# Altium PCB BleDemoBoard.PcbDoc
Units mil, origin at the board's own origin, x right, y up, seen from the top; angles counter-clockwise.
Board outline 3545 x 3150 mil, 2 copper layers (Top Layer, Bottom Layer); 24 components, 22 nets, 90 pads, 3 vias.
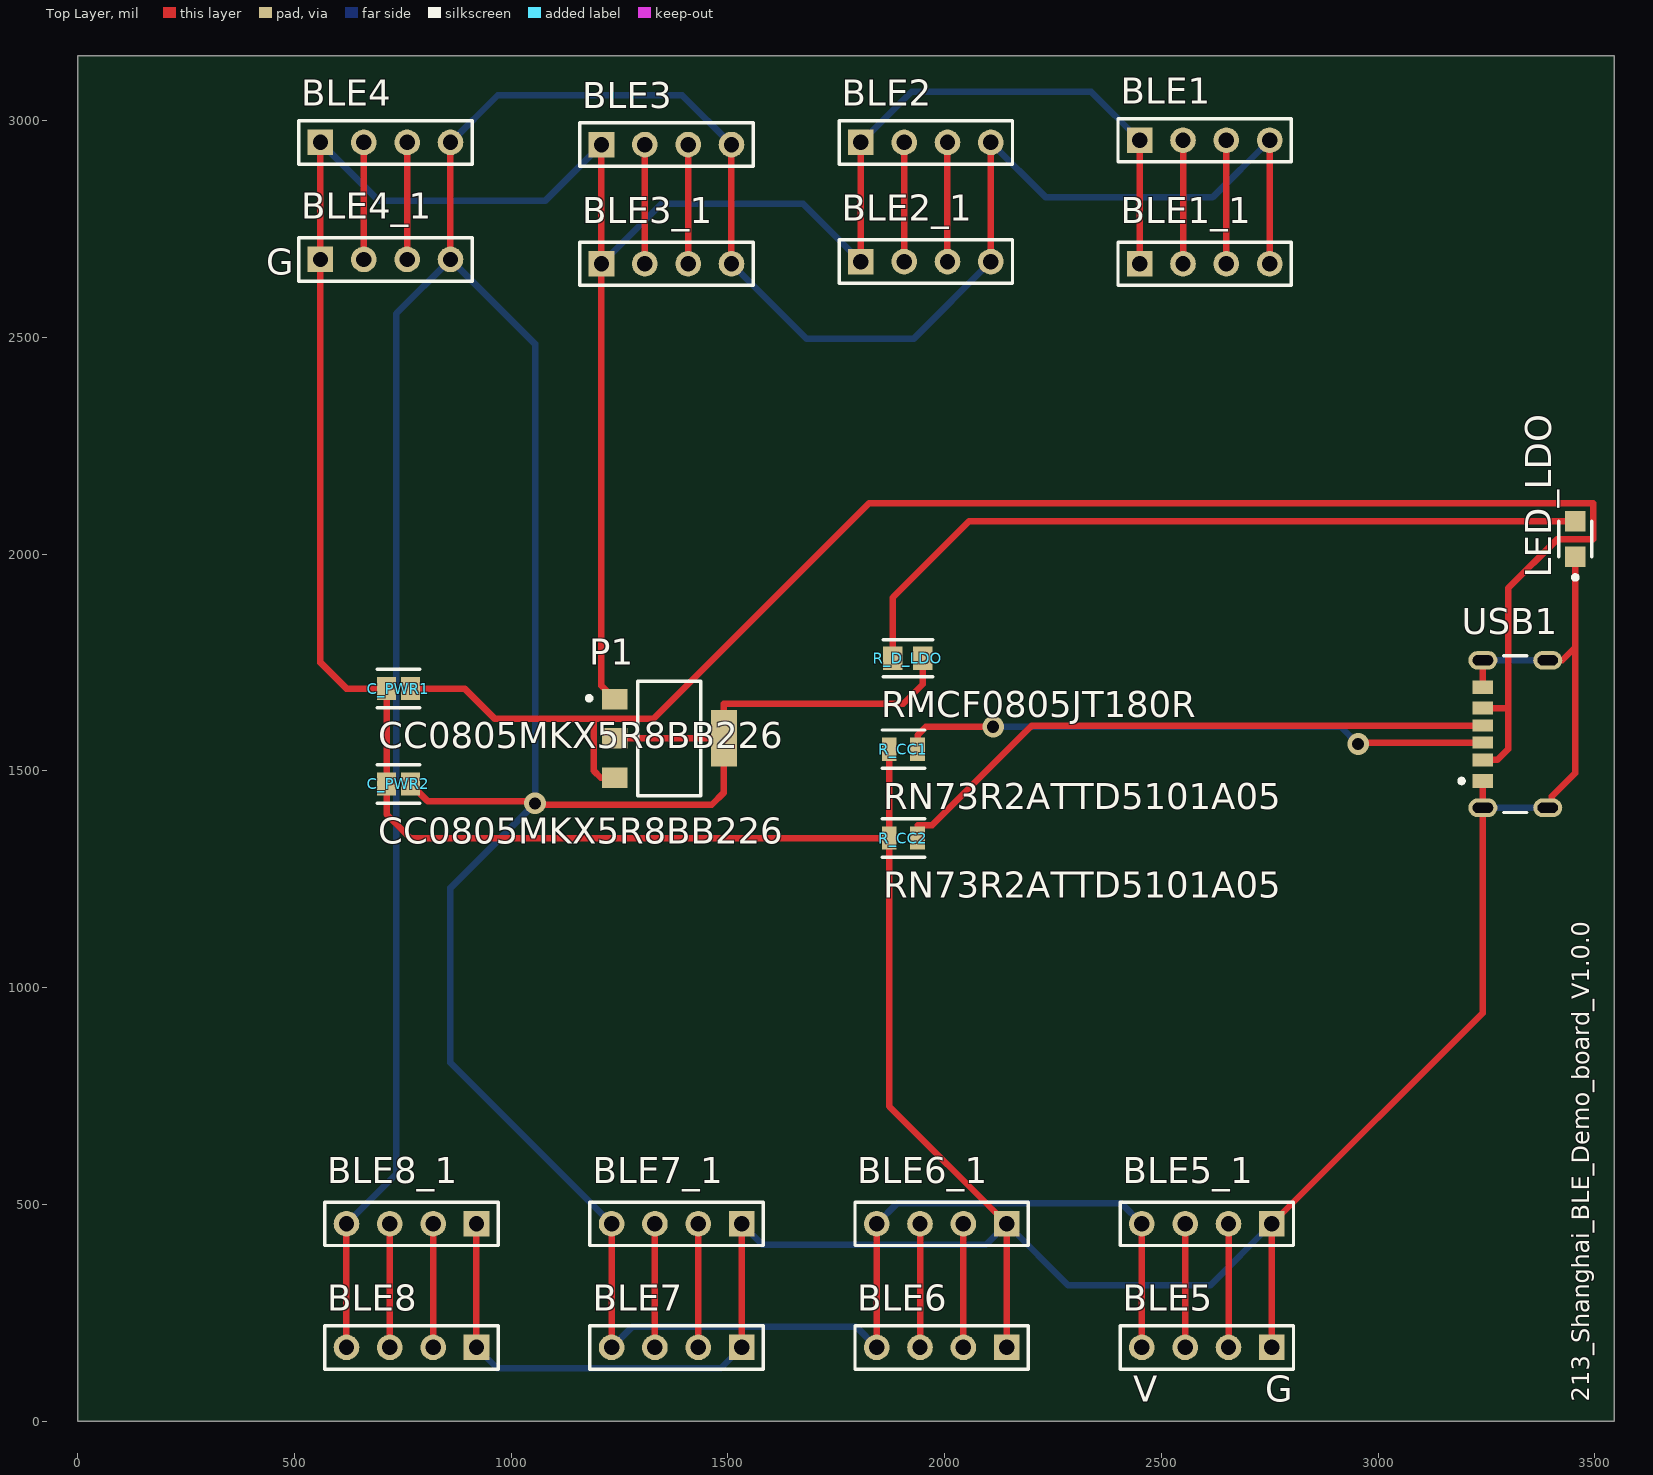
[diagram p0: Top Layer view]
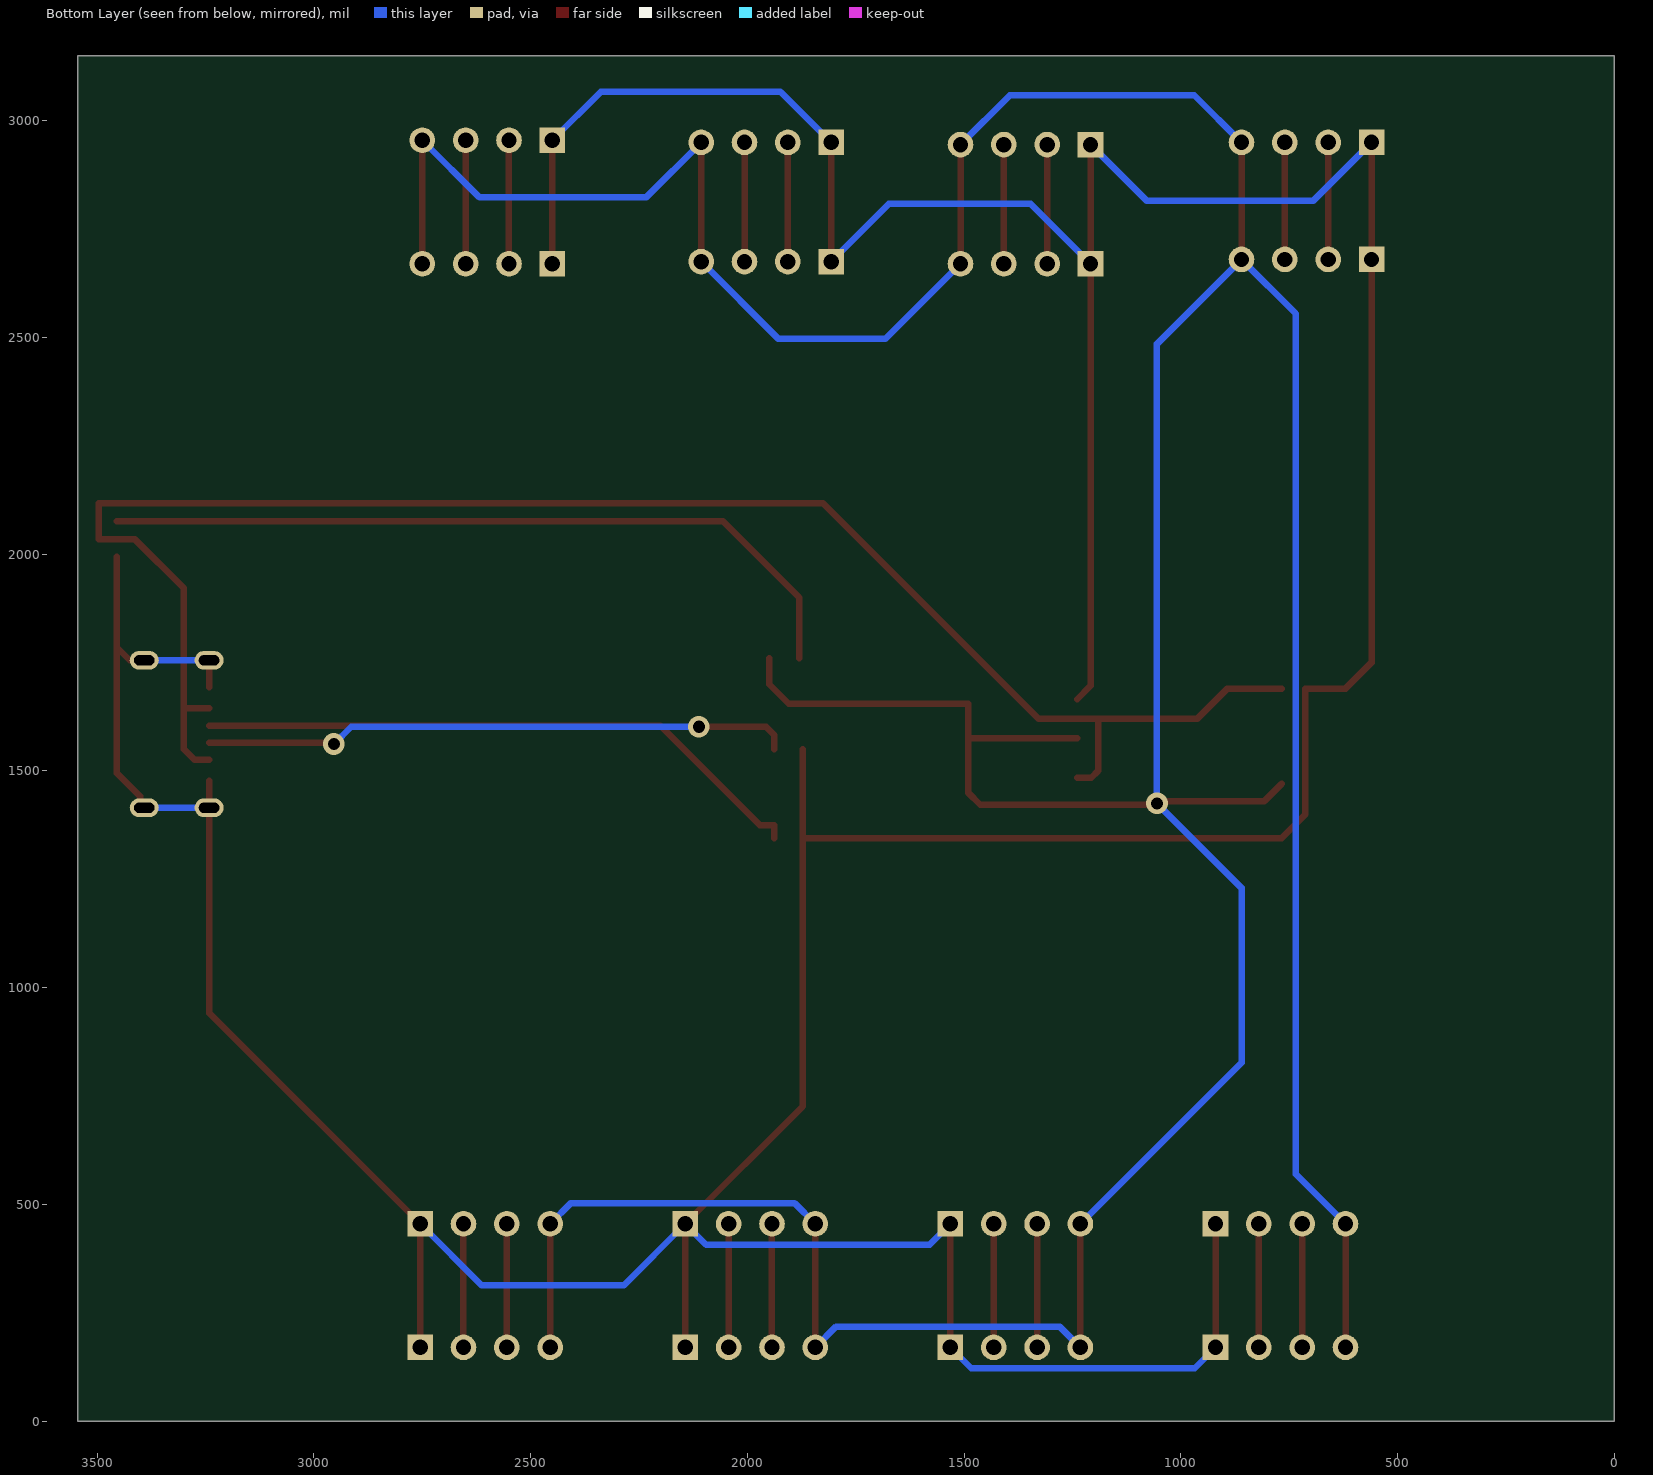
[diagram p1: Bottom Layer view, seen from below]

## Layer stack, top to bottom
Top Solder: solder mask 0.4, Solder Resist, Dk 3.5
Top Layer: signal copper 1.4
Dielectric 1: dielectric 12.6, FR-4, Dk 4.8
Bottom Layer: signal copper 1.4
Bottom Solder: solder mask 0.4, Solder Resist, Dk 3.5

## Board outline
0,0 3545,0 3545,3150 0,3150

## Design rules (kind name [scope] priority, off if disabled: settings)
Clearance [All] p1: gap=10 ignorepadtopadclearanceinfootprint=FALSE except(0: Arc-Hole Track-Hole SMDPad-Hole THPad-Hole Via-Hole Fill-Hole Poly-Hole Region-Hole Text-Hole)
PolygonConnect [All] p1: connectstyle=Relief reliefconductorwidth=10 reliefentries=4 polygonreliefangle="90 Angle" airgapwidth=10
RoutingVias [All] p1: holewidth=28 width=50 viastyle="Through Hole" minholewidth=28 minwidth=50 maxholewidth=28 maxwidth=50
SolderMaskExpansion [All] p1: expansion=4 istentingtop=FALSE
Width [All] p1: maxlimit=15 minlimit=15 preferedwidth=15
30 further rules are at their usual default settings.

## Components (designator, comment, footprint, x,y, rotation, side; value= is the part's Value field where it differs from the comment)
BLE1 "Header BLE" HDR1X4 2450,2955 r0 top
BLE1_1 "Header BLE" HDR1X4 2450,2670 r0 top
BLE2 "Header BLE" HDR1X4 1806.67,2950 r0 top
BLE2_1 "Header BLE" HDR1X4 1806.67,2675 r0 top
BLE3 "Header BLE" HDR1X4 1208.33,2945 r0 top
BLE3_1 "Header BLE" HDR1X4 1208.33,2670 r0 top
BLE4 "Header BLE" HDR1X4 560,2950 r0 top
BLE4_1 "Header BLE" HDR1X4 560,2680 r0 top
BLE5 "Header BLE" HDR1X4 2755,170 r180 top
BLE5_1 "Header BLE" HDR1X4 2755,455 r180 top
BLE6 "Header BLE" HDR1X4 2143.33,170 r180 top
BLE6_1 "Header BLE" HDR1X4 2143.33,455 r180 top
BLE7 "Header BLE" HDR1X4 1531.67,170 r180 top
BLE7_1 "Header BLE" HDR1X4 1531.67,455 r180 top
BLE8 "Header BLE" HDR1X4 920,170 r180 top
BLE8_1 "Header BLE" HDR1X4 920,455 r180 top
C_PWR1 "CC0805MKX5R8BB226" FP-CC0805-0_2-1_45-IPC_C 740,1690 r180 top
C_PWR2 "CC0805MKX5R8BB226" FP-CC0805-0_2-1_45-IPC_C 740,1470 r180 top
LED_LDO "APHCM2012CGCK-F01" FP-APHCM2012CGCK-F01-MFG 3455,2035 r90 top
P1 "LD1117S33" FP-SOT-223-0046067_14-MFG 1365,1575 r0 top
R_CC1 "RN73R2ATTD5101A05" FP-RN73R2A-IPC_C 1905,1550 r180 top
R_CC2 "RN73R2ATTD5101A05" FP-RN73R2A-IPC_C 1905,1345 r180 top
R_D_LDO "RMCF0805JT180R" FP-RMCF0805-IPC_B 1915,1760 r180 top
USB1 "USB4125-GF-A-0190" FP-USB4125-GF-A-0190-MFG 3360,1585 r90 top

## Footprints (in the part's own frame and the unit in brackets; to place one, negate y for a bottom-side part, rotate by r counter-clockwise, add the part's x,y. Pads: shape width x height; smd on the part's side, far side on the other; paste and mask are expansions set on the pad)
FP-APHCM2012CGCK-F01-MFG [mm]
  rect 1.2x1.2 smd paste+0 mask+0: 1(-1.05,0) 2(1.05,0)
  silkscreen extent -2.37,-0.98 1.05,0.98, body extent -1.75,-0.77 1.75,0.77, height 0.25
FP-CC0805-0_2-1_45-IPC_C [mil]
  rect 43.49x53.39 smd paste+0 mask+0: 1(-27.59,0) 2(27.59,0)
  silkscreen extent -49,-44 49,44, body extent -53,-32 53,32, height 10
FP-RMCF0805-IPC_B [mil]
  rect 45.46x53.63 smd paste+0 mask+0: 1(-34.48,0) 2(34.48,0)
  silkscreen extent -57,-43 57,43, body extent -67,-37 67,37, height 10
FP-RN73R2A-IPC_C [mil]
  rect 33.67x53.39 smd paste+0 mask+0: 1(-32.5,0) 2(32.5,0)
  silkscreen extent -49,-44 49,44, body extent -53,-32 53,32, height 10
FP-SOT-223-0046067_14-MFG [mm]
  rect 1.5x1.2 smd paste+0 mask+0: 1(-3.2,2.3) 2(-3.2,0) 3(-3.2,-2.3)
  rect 1.5x3.3 smd paste+0 mask+0: 4(3.2,0)
  silkscreen extent -4.82,-3.35 1.85,3.35, body extent -4.05,-3.45 4.05,3.45, height 0.25
FP-USB4125-GF-A-0190-MFG [mm]
  rrect100% 1.1x1.7 hole 1.2 slot 0.6 at 0 deg paste-1000 mask+0: 1(-4.32,3) 2(4.32,3) 3(-4.32,-0.8) 4(4.32,-0.8)
  rect 0.7x1.2 smd paste+0 mask+0: A5(-0.5,3) B5(0.5,3)
  rect 0.76x1.2 smd paste+0 mask+0: A9(1.52,3) B9(-1.52,3)
  rect 0.8x1.2 smd paste+0 mask+0: A12(2.75,3) B12(-2.75,3)
  silkscreen extent -4.6,0.42 4.6,4.37, body extent -4.97,-3.57 4.97,3.95, height 0.25
HDR1X4 [mm] "Connector; Header; 4 Position"
  rect 1.5x1.5 hole 0.9: 1(0,0)
  round 1.5 hole 0.9: 2(2.54,0) 3(5.08,0) 4(7.62,0)
  silkscreen extent -1.27,-1.27 8.89,1.27

## Part data
BLE1 BLE1_1 BLE2 BLE2_1 BLE3 BLE3_1 BLE4 BLE4_1 BLE5 BLE5_1 BLE6 BLE6_1 BLE7 BLE7_1 BLE8 BLE8_1: library part "Header 4", "Header, 4-Pin", LatestRevisionDate=17-Jul-2002, LatestRevisionNote="Re-released for DXP Platform.", Publisher="Altium Limited"
C_PWR1 C_PWR2: library part CMP-03422-001497-1, "CAP CER 22UF 25V X5R 0805", Capacitance=22uF, Case Code (Imperial)=0805, Case Code (Metric)=2012, Dielectric=X5R, Max Operating Temperature=85°C, Min Operating Temperature=-55°C, Package Quantity=3000, Tolerance=20%, Voltage Rating=25V, Case/Package=0805, Halogen Free="Halogen Free", Height=1.25mm, Lead Free="Lead Free", Length=0.079inch, Mount="Surface Mount", Packaging="Tape and Reel", RoHS Compliant=Yes, Termination=SMD/SMT, Thickness=0.057inch, Voltage Rating (DC)=25V, Weight=0.000194oz, Width=0.049inch
LED_LDO: library part CMP-44529-000062-1, "LED GREEN CLEAR CHIP SMD", Case Code (Imperial)=0805, Case Code (Metric)=2012, Color=Green, Forward Current=20mA, Forward Voltage=2.1V, Lens Color=Clear, Max Operating Temperature=85°C, Min Operating Temperature=-40°C, Package Quantity=1, Case/Package=0805, Dominant Wavelength=570nm, Height=0.4mm, Illumination Color=Green, Lead Free="Lead Free", Length=2mm, Lens Style=Clear, Luminous Intensity=40mcd, Mount="Surface Mount", Number of LEDs=1, Number of Pins=2, Packaging="Tape and Reel", RoHS Compliant=Yes, Series=APHCM, Test Current=20mA, Viewing Angle=110°, Wavelength=570nm, Width=1.25mm
P1: library part CMP-0244-00307-2, "IC REG LINEAR 3.3V 800MA SOT223", Case/Package=SOT-223, Dropout Voltage=1.1V, Input Bias Current=5mA, Max Input Voltage=15V, Max Operating Temperature=125°C, Max Output Current=1.3A, Max Output Voltage=3.3V, Max Power Dissipation=12W, Min Input Voltage=5.3V, Min Operating Temperature=-40°C, Output Current=950mA, Output Voltage Accuracy=1%, Package Quantity=1, Quiescent Current=10mA, Accuracy=1%, Contact Plating=Tin, Height=1.8mm, Lead Free="Lead Free", Length=6.5mm, Max Supply Voltage=15V, Min Output Voltage=3.3V, Min Supply Voltage=3.3V, Mount="Surface Mount", Nominal Output Voltage=3.3V, Number Of Outputs=1, Number of Pins=4, Number of Regulators=1, Number of Terminals=4, Output Type=Fixed, Output Voltage=3.3V, Packaging="Tape and Reel", Polarity=Positive, Power Dissipation=12W, Radiation Hardening=No, REACH SVHC="No SVHC", Termination=SMD/SMT, Weight=0.01lb, Width=3.5mm
R_CC1 R_CC2: library part CMP-04015-014497-1, "5.1kΩ ±0.05% 0.125W, 1/8W Chip Resistor 0805 (2012 Metric) Moisture Resistant Thin Film"
R_D_LDO: library part CMP-26527-003283-1, "180Ω ±5% 0.125W 0805 Thick Film Chip Resistor AEC-Q200 compliant", Case Code (Imperial)=0805, Case Code (Metric)=2012, Max Operating Temperature=155°C, Max Power Dissipation=125mW, Min Operating Temperature=-55°C, Resistance=180R, Resistor Type="Thick Film", Temperature Coefficient=200ppm/°C, Tolerance=5%, Case/Package=0805, Construction=Rectangular, Contact Plating=Tin, Depth=1.25mm, Features="Automotive AEC-Q200", Height=0.026inch, Lead Free="Lead Free", Length=0.079inch, Military Standard=Not, Mount="Surface Mount", Number of Terminations=2, Packaging="Tape and Reel", Radiation Hardening=No, RoHS Compliant=Yes, Series=RMCF, Width=0.049inch
USB1: library part CMP-245163-000004-1, "CONN RCPT TYPE C 6P SMD RA"

## Via types
v1: diameter 50, hole 28, Top Layer to Bottom Layer, 3 vias

## Nets (pads, with @x,y where several pads share a name; then routed paths per layer and width w, separated by ;. In a path a pad name is that pad's centre, name@x,y a point inside that pad or via, vN(x,y) a via of type N, cw(c..) or ccw(c..) an arc to the next point about the centre after c; other vN are vias at no path point)
3V3: BLE1.4 BLE1_1.4 BLE2.4 BLE2_1.4 BLE3.4 BLE3_1.4 BLE4.4 BLE4_1.4 BLE5.4 BLE5_1.4 BLE6.4 BLE6_1.4 BLE7.4 BLE7_1.4 BLE8.4 BLE8_1.4 C_PWR2.1 P1.2 P1.4 R_D_LDO.1 | length 12395.8
  Top Layer w15: BLE8.4 BLE8_1.4 ; C_PWR2.1 807.15,1430.44 901,1430.44 966.91,1430.44 1049.56,1430.44 v1(1055,1425) ; BLE4_1.4 BLE4.4 ; v1@1055,1422 1462.98,1422 1490.98,1450 P1.4 ; BLE7.4 BLE7_1.4 ; P1.2 P1.4 ; BLE3_1.4 BLE3.4 ; BLE6.4 BLE6_1.4 ; R_D_LDO.1 1949.48,1700 1904.48,1655 1490.98,1655 P1.4 ; BLE2_1.4 BLE2.4 ; BLE5.4 BLE5_1.4 ; BLE1_1.4 BLE1.4
  Bottom Layer w15: BLE8_1.4 735,570 735,2555 BLE4_1.4 1055,2485 v1(1055,1425) 860,1230 860,826.67 BLE7_1.4 ; BLE4.4 969,3059 1394.33,3059 BLE3.4 ; BLE7.4 1279.67,218 1795.33,218 BLE6.4 ; BLE3_1.4 1681.67,2496.67 1928.33,2496.67 BLE2_1.4 ; BLE6_1.4 1891.33,503 2407,503 BLE5_1.4 ; BLE2.4 2233.67,2823 2618,2823 BLE1.4
5V: C_PWR1.1 P1.3 USB1.A9 USB1.B9 | length 3963.9
  Top Layer w15: C_PWR1.1 892.45,1690 962.45,1620 1191,1620 ; P1.3 1206.55,1484.45 1191,1500 1191,1620 ; USB1.B9 3275,1525.16 3300,1550.16 3300,1644.84 ; USB1.A9 3300,1644.84 ; 1191,1620 1328,1620 1826,2118 3497,2118 3497,2035 3413.88,2035 3300,1921.12 3300,1644.84
GND: BLE1.1 BLE1_1.1 BLE2.1 BLE2_1.1 BLE3.1 BLE3_1.1 BLE4.1 BLE4_1.1 BLE5.1 BLE5_1.1 BLE6.1 BLE6_1.1 BLE7.1 BLE7_1.1 BLE8.1 BLE8_1.1 C_PWR1.2 C_PWR2.2 LED_LDO.1 P1.1 R_CC1.2 R_CC2.2 USB1.1 USB1.2 USB1.3 USB1.4 USB1.A12 USB1.B12 | length 13560
  Top Layer w15: BLE4.1 BLE4_1.1 560,1750 620,1690 C_PWR1.2 C_PWR2.2 712.41,1400 767.41,1345 R_CC2.2 ; BLE8.1 BLE8_1.1 ; BLE3.1 BLE3_1.1 1208.33,1696.23 P1.1 ; BLE7.1 BLE7_1.1 ; BLE2_1.1 BLE2.1 ; R_CC1.2 R_CC2.2 ; BLE6.1 BLE6_1.1 1872.5,725.83 R_CC2.2 ; BLE1_1.1 BLE1.1 ; BLE5.1 BLE5_1.1 3241,941 3241,1414.92 USB1.1 USB1.B12 ; USB1.A12 USB1.2 ; USB1.3 3401,1414.92 3401,1441 3455,1495 3455,1785.08 ; USB1.4 3425,1755.08 3455,1785.08 ; LED_LDO.1 3455,1785.08
  Bottom Layer w15: BLE4.1 695,2815 1078.33,2815 BLE3.1 ; BLE8.1 968,122 1483.67,122 BLE7.1 ; BLE3_1.1 1346.33,2808 1673.67,2808 BLE2_1.1 ; BLE7_1.1 1579.67,407 2095.33,407 BLE6_1.1 2285.33,313 2613,313 BLE5_1.1 ; BLE2.1 1923.67,3067 2338,3067 BLE1.1 ; USB1.1 USB1.3 ; USB1.2 USB1.4
NetBLE1_1_2: BLE1.2 BLE1_1.2 | length 285
  Top Layer w15: BLE1_1.2 BLE1.2
NetBLE1_1_3: BLE1.3 BLE1_1.3 | length 285
  Top Layer w15: BLE1_1.3 BLE1.3
NetBLE2_1_2: BLE2.2 BLE2_1.2 | length 275
  Top Layer w15: BLE2_1.2 BLE2.2
NetBLE2_1_3: BLE2.3 BLE2_1.3 | length 275
  Top Layer w15: BLE2_1.3 BLE2.3
NetBLE3_1_2: BLE3.2 BLE3_1.2 | length 275
  Top Layer w15: BLE3_1.2 BLE3.2
NetBLE3_1_3: BLE3.3 BLE3_1.3 | length 275
  Top Layer w15: BLE3_1.3 BLE3.3
NetBLE4_1_2: BLE4.2 BLE4_1.2 | length 270
  Top Layer w15: BLE4_1.2 BLE4.2
NetBLE4_1_3: BLE4.3 BLE4_1.3 | length 270
  Top Layer w15: BLE4_1.3 BLE4.3
NetBLE5_1_2: BLE5.2 BLE5_1.2 | length 285
  Top Layer w15: BLE5.2 BLE5_1.2
NetBLE5_1_3: BLE5.3 BLE5_1.3 | length 285
  Top Layer w15: BLE5.3 BLE5_1.3
NetBLE6_1_2: BLE6.2 BLE6_1.2 | length 285
  Top Layer w15: BLE6.2 BLE6_1.2
NetBLE6_1_3: BLE6.3 BLE6_1.3 | length 285
  Top Layer w15: BLE6.3 BLE6_1.3
NetBLE7_1_2: BLE7.2 BLE7_1.2 | length 285
  Top Layer w15: BLE7.2 BLE7_1.2
NetBLE7_1_3: BLE7.3 BLE7_1.3 | length 285
  Top Layer w15: BLE7.3 BLE7_1.3
NetBLE8_1_2: BLE8.2 BLE8_1.2 | length 285
  Top Layer w15: BLE8.2 BLE8_1.2
NetBLE8_1_3: BLE8.3 BLE8_1.3 | length 285
  Top Layer w15: BLE8.3 BLE8_1.3
NetLED_LDO_2: LED_LDO.2 R_D_LDO.2 | length 1787.5
  Top Layer w15: R_D_LDO.2 1880.52,1900 2056.86,2076.34 LED_LDO.2
NetR_CC1_1: R_CC1.1 USB1.A5 | length 1362.9
  Top Layer w15: R_CC1.1 1937.5,1582.5 1957,1602 v1(2112,1602) ; v1(2954,1562) 2957.32,1565.32 USB1.A5
  Bottom Layer w15: v1(2112,1602) 2914,1602 v1(2954,1562)
NetR_CC2_1: R_CC2.1 USB1.B5 | length 1429.5
  Top Layer w15: R_CC2.1 1937.5,1375 1971.54,1375 2201.22,1604.69 USB1.B5

## Silkscreen, mask and mechanical layers (free items; w line width, h text height)
Top Overlay:
  text "G" at 435,2645 h60
  text "V" at 2435,45 h60
  text "G" at 2740,45 h60
  text "213_Shanghai_BLE_Demo_board_V1.0.0" at 3486.67,45 h40 r90